# EAGLE board motor driver (EAGLE 6.5.0)
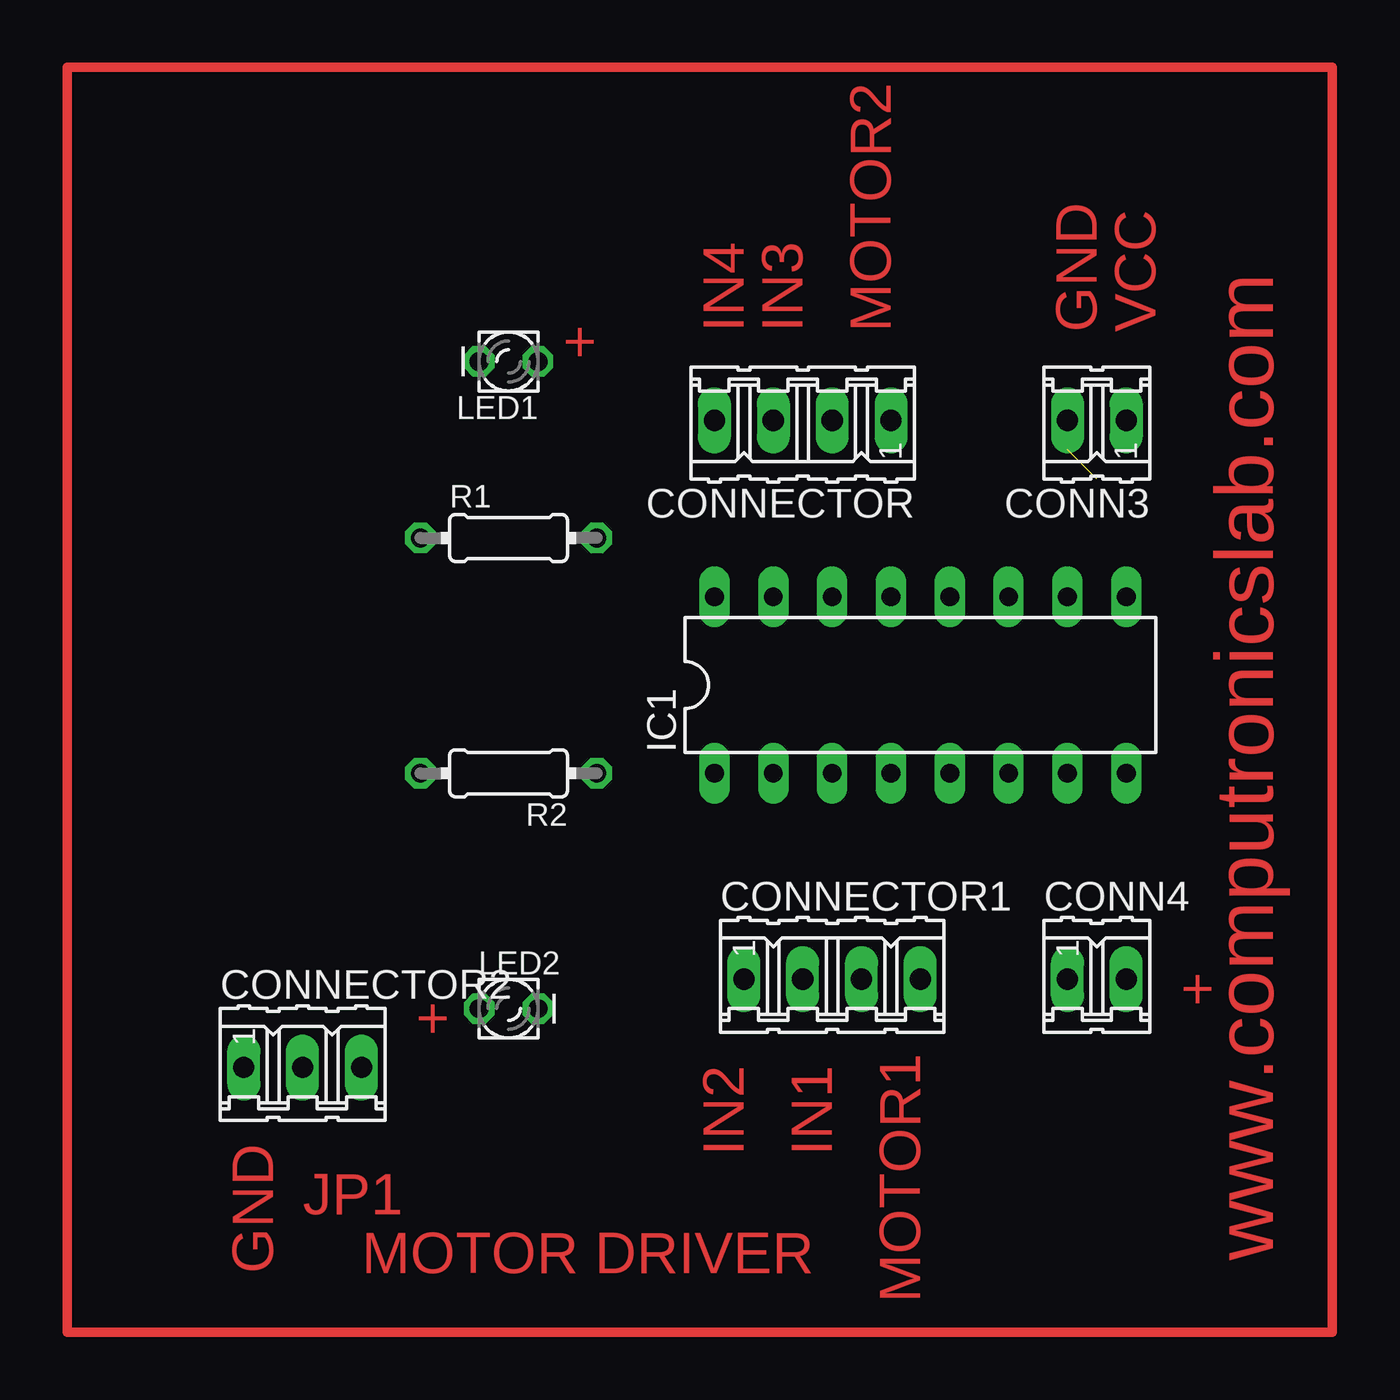
[diagram p0: board, top side]
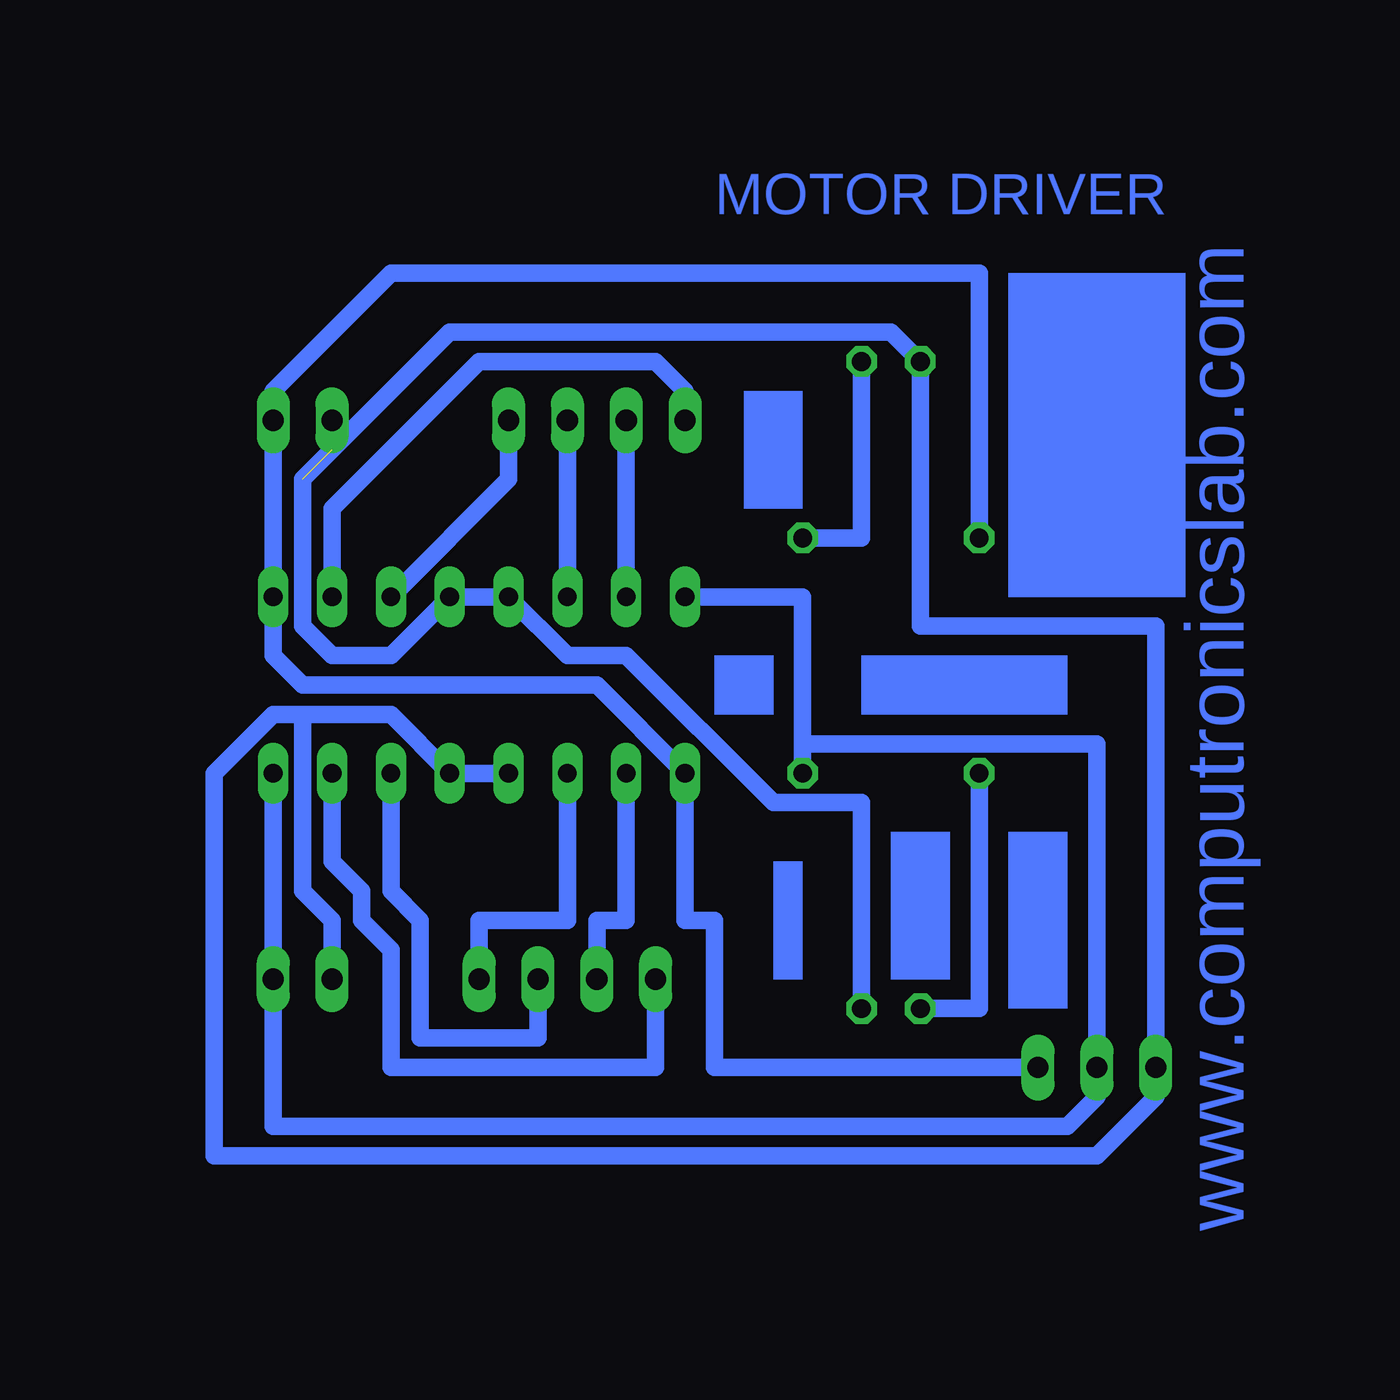
[diagram p1: board, bottom side, seen from below]

No outline drawn. Coordinates in mm, seen from the top.
Copper layers (1*16): Top 0.035mm / dielectric 1.5mm / Bottom 0.035mm
Design rules "default *": minimum track width 30mil, minimum drill 24mil, track to track 8mil, track to pad 8mil, pad to pad 8mil, via to via 8mil, smd to smd 8mil, copper to edge 40mil, drill to drill 8mil, minimum pad ring 10mil, minimum via ring 8mil, stop-mask expansion 4mil, vias tented up to drill 0mil, thermal gap 10mil

## Footprints (pad centres in the part's own frame; a part is rotated, then mirrored left to right if it is on the bottom)
02P = drill 0.914 long: 1 -1.27,0; 2 1.27,0
04P = drill 0.914 long: 1 -3.81,0; 2 -1.27,0; 3 1.27,0; 4 3.81,0
03P = drill 0.914 long: 1 -2.54,0; 2 0,0; 3 2.54,0
DIL16 = drill 0.813 long: 1 -8.89,-3.81; 2 -6.35,-3.81; 3 -3.81,-3.81; 4 -1.27,-3.81; 5 1.27,-3.81; 6 3.81,-3.81; 7 6.35,-3.81; 8 8.89,-3.81; 9 8.89,3.81; 10 6.35,3.81; 11 3.81,3.81; 12 1.27,3.81; 13 -1.27,3.81; 14 -3.81,3.81; 15 -6.35,3.81; 16 -8.89,3.81
LED_LD260 = drill 0.813 octagon: A -1.27,0; K 1.27,0
0204/7 = drill 0.813 octagon: 1 -3.81,0; 2 3.81,0

## Placement (x,y rotation side)
CONN3  2 pin  [02P]  63.5,49.53 180 top
CONN4  2 pin  [02P]  63.5,25.4 0 top
CONNECTOR  4 pin  [04P]  50.8,49.53 180 top
CONNECTOR1  4 pin  [04P]  52.07,25.4 0 top
CONNECTOR2  3 pin  [03P]  29.21,21.59 0 top
IC1  L293D  [DIL16]  55.88,38.1 0 top
LED1  5mm  [LED_LD260]  38.1,52.07 180 top
LED2  5mm  [LED_LD260]  38.1,24.13 0 top
R1  330E  [0204/7]  38.1,44.45 0 top
R2  330E  [0204/7]  38.1,34.29 180 top

## Library data of the parts
CONN3 CONN4 CONNECTOR CONNECTOR1 CONNECTOR2 = con-amp-quick; OC_FARNELL: unknown; OC_NEWARK: unknown
IC1 = st-microelectronics; MPN: L293D; OC_FARNELL: 9589619; OC_NEWARK: 56P8249
LED1 LED2 = eagle-ltspice; SPICEMODEL: NONE; SPICEPREFIX: D; SPICETYPE: diode
R1 R2 = rcl

## Nets
N$1: LED1.A R1.2
N$2: LED2.A R2.2
N$4: CONNECTOR1.2 IC1.2
N$5: CONNECTOR1.4 IC1.3
N$6: CONNECTOR1.3 IC1.6
N$7: CONNECTOR1.1 IC1.7
N$8: CONNECTOR.3 IC1.15
N$9: CONNECTOR.4 IC1.10
N$10: CONNECTOR.2 IC1.14
N$11: CONNECTOR.1 IC1.11
N$12: CONN3.2 CONN4.1 CONNECTOR2.1 IC1.4 IC1.5 IC1.12 IC1.13 LED1.K LED2.K
N$13: CONN3.1 CONNECTOR2.3 IC1.1 IC1.9 R1.1
N$14: CONN4.2 CONNECTOR2.2 IC1.8 IC1.16 R2.1

## Tracks (layer width: path | path; a pad name or v marks a point on that pad's centre or on a via)
N$1
  Bottom 0.762: LED1.A 39.37,44.45 R1.2
N$2
  Bottom 0.762: R2.2 34.29,24.13 LED2.A
N$3
  Top 0.406: 19.05,64.77 73.66,64.77 73.66,10.16 19.05,10.16 19.05,64.77
N$4
  Bottom 0.762: IC1.2 49.53,27.94 50.8,27.94 50.8,26.67 CONNECTOR1.2
N$5
  Bottom 0.762: IC1.3 52.07,27.94 54.61,27.94 55.88,27.94 55.88,26.67 CONNECTOR1.4
N$6
  Bottom 0.762: IC1.6 59.69,29.21 58.42,27.94 58.42,22.86 54.61,22.86 53.34,22.86 53.34,24.13 CONNECTOR1.3
N$7
  Bottom 0.762: IC1.7 62.23,30.48 60.96,29.21 60.96,27.94 59.69,26.67 59.69,21.59 48.26,21.59 CONNECTOR1.1
N$8
  Bottom 0.762: CONNECTOR.3 IC1.15
N$9
  Bottom 0.762: IC1.10 62.23,45.72 55.88,52.07 48.26,52.07 46.99,50.8 CONNECTOR.4
N$10
  Bottom 0.762: CONNECTOR.2 IC1.14
N$11
  Bottom 0.762: IC1.11 54.61,46.99 CONNECTOR.1
N$12  (1 unrouted)
  Bottom 0.762: LED2.K 39.37,33.02 43.18,33.02 49.53,39.37 52.07,39.37 IC1.13 IC1.12 59.69,39.37 62.23,39.37 63.5,40.64 63.5,46.99 57.15,53.34 38.1,53.34 LED1.K 36.83,40.64 26.67,40.64 CONNECTOR2.1 26.67,20.32 29.21,17.78 67.31,17.78 67.31,34.29 64.77,36.83 63.5,36.83 | IC1.4 IC1.5 59.69,36.83 63.5,36.83 | CONN4.1 62.23,27.94 63.5,29.21 63.5,36.83 | CONN3.2 62.23,48.26 58.42,52.07
N$13
  Bottom 0.762: CONNECTOR2.3 40.64,21.59 45.72,21.59 45.72,27.94 46.99,27.94 IC1.1 50.8,38.1 63.5,38.1 64.77,39.37 IC1.9 CONN3.1 64.77,50.8 59.69,55.88 34.29,55.88 R1.1
N$14
  Bottom 0.762: IC1.8 CONN4.2 64.77,19.05 30.48,19.05 29.21,20.32 CONNECTOR2.2 29.21,35.56 41.91,35.56 | 41.91,35.56 41.91,41.91 IC1.16 | 41.91,35.56 R2.1
(copper drawn outside any net)
  shapes: Bottom area x7

## Text on the board
Top: www.computronicslab.com | IN4 | IN3 | MOTOR2 | GND | VCC | + | + | + | IN2 | IN1 | JP1 | GND | MOTOR DRIVER | MOTOR1
Bottom: MOTOR DRIVER | www.computronicslab.com